# Altium PCB PCB1.PcbDoc
Units mm, origin at the board's own origin, x right, y up, seen from the top; angles counter-clockwise.
Board outline 40 x 30 mm, 2 copper layers (Top Layer, Bottom Layer); 3 components, 7 nets, 38 pads, 0 vias.
Unrouted connection lines stored in the file: 3.
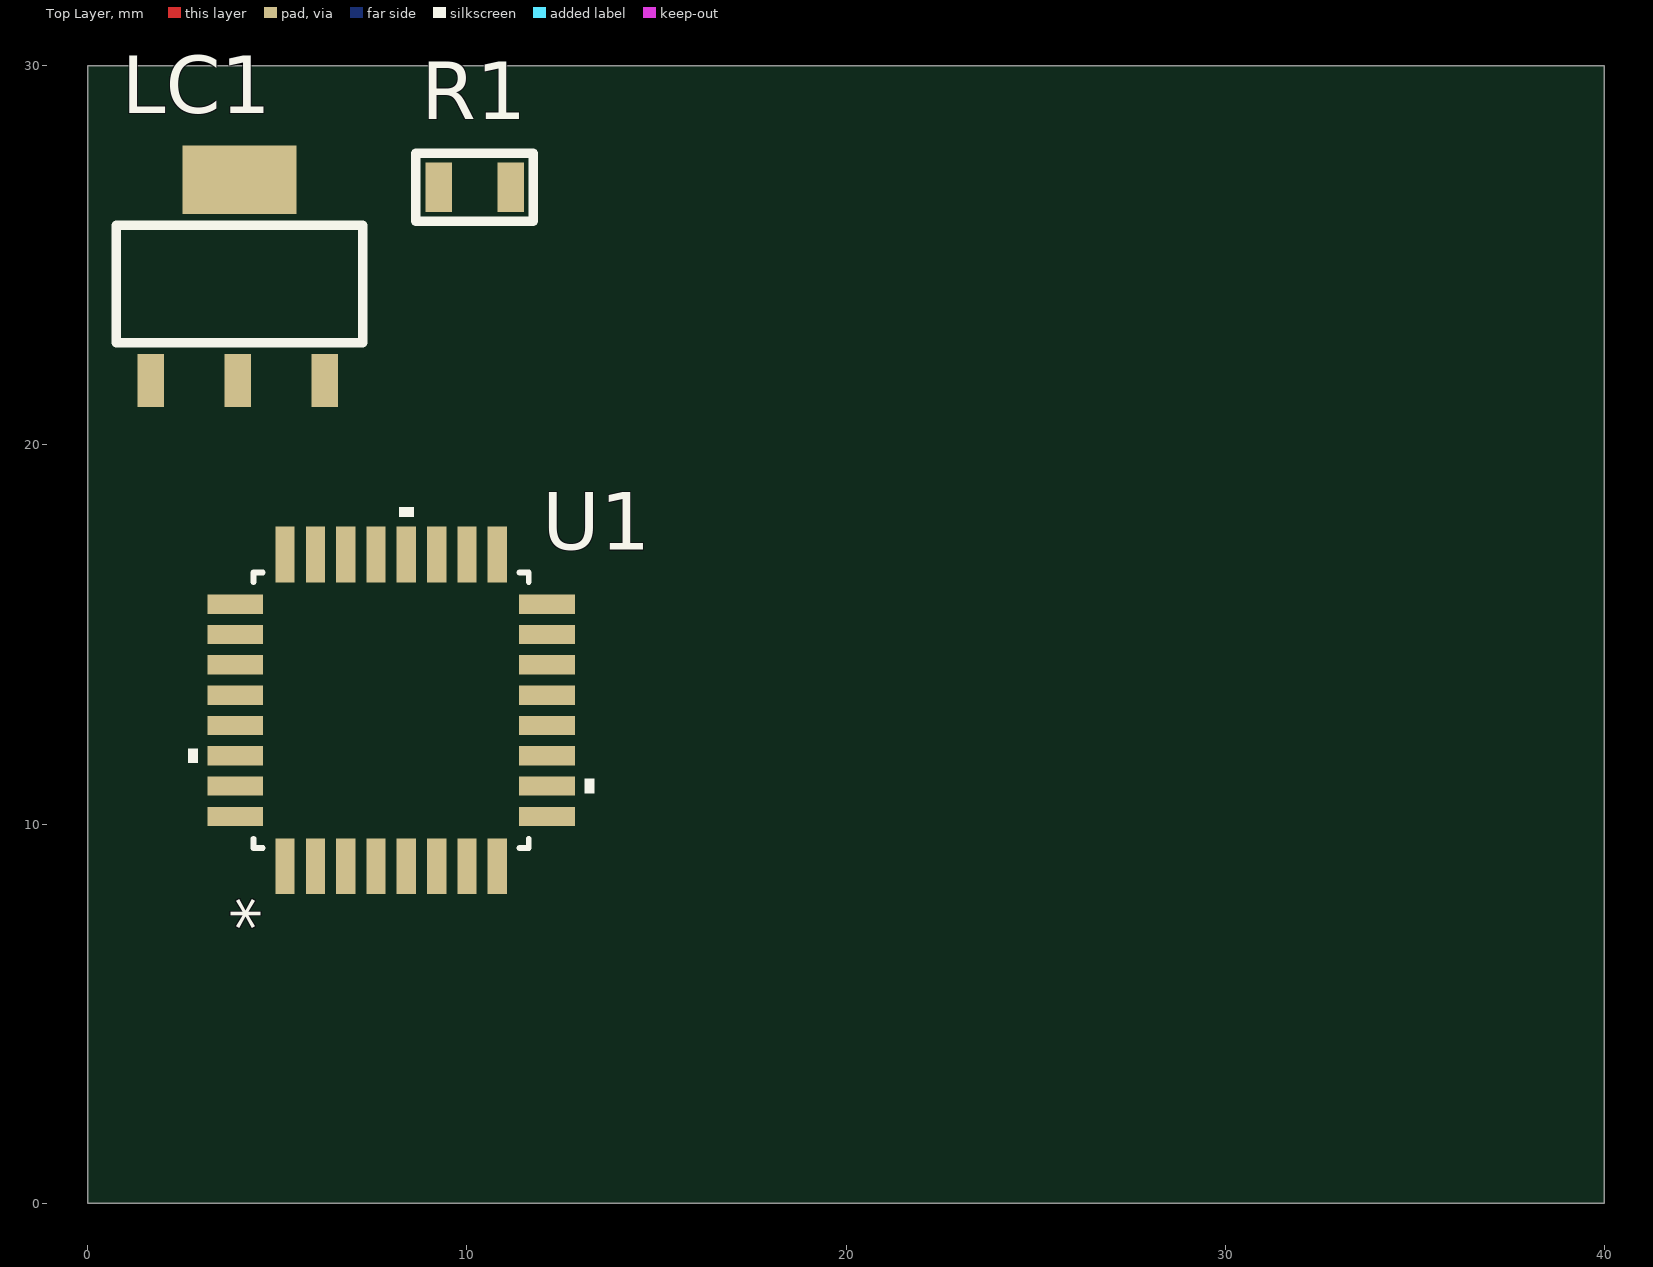
[diagram p0: Top Layer view]
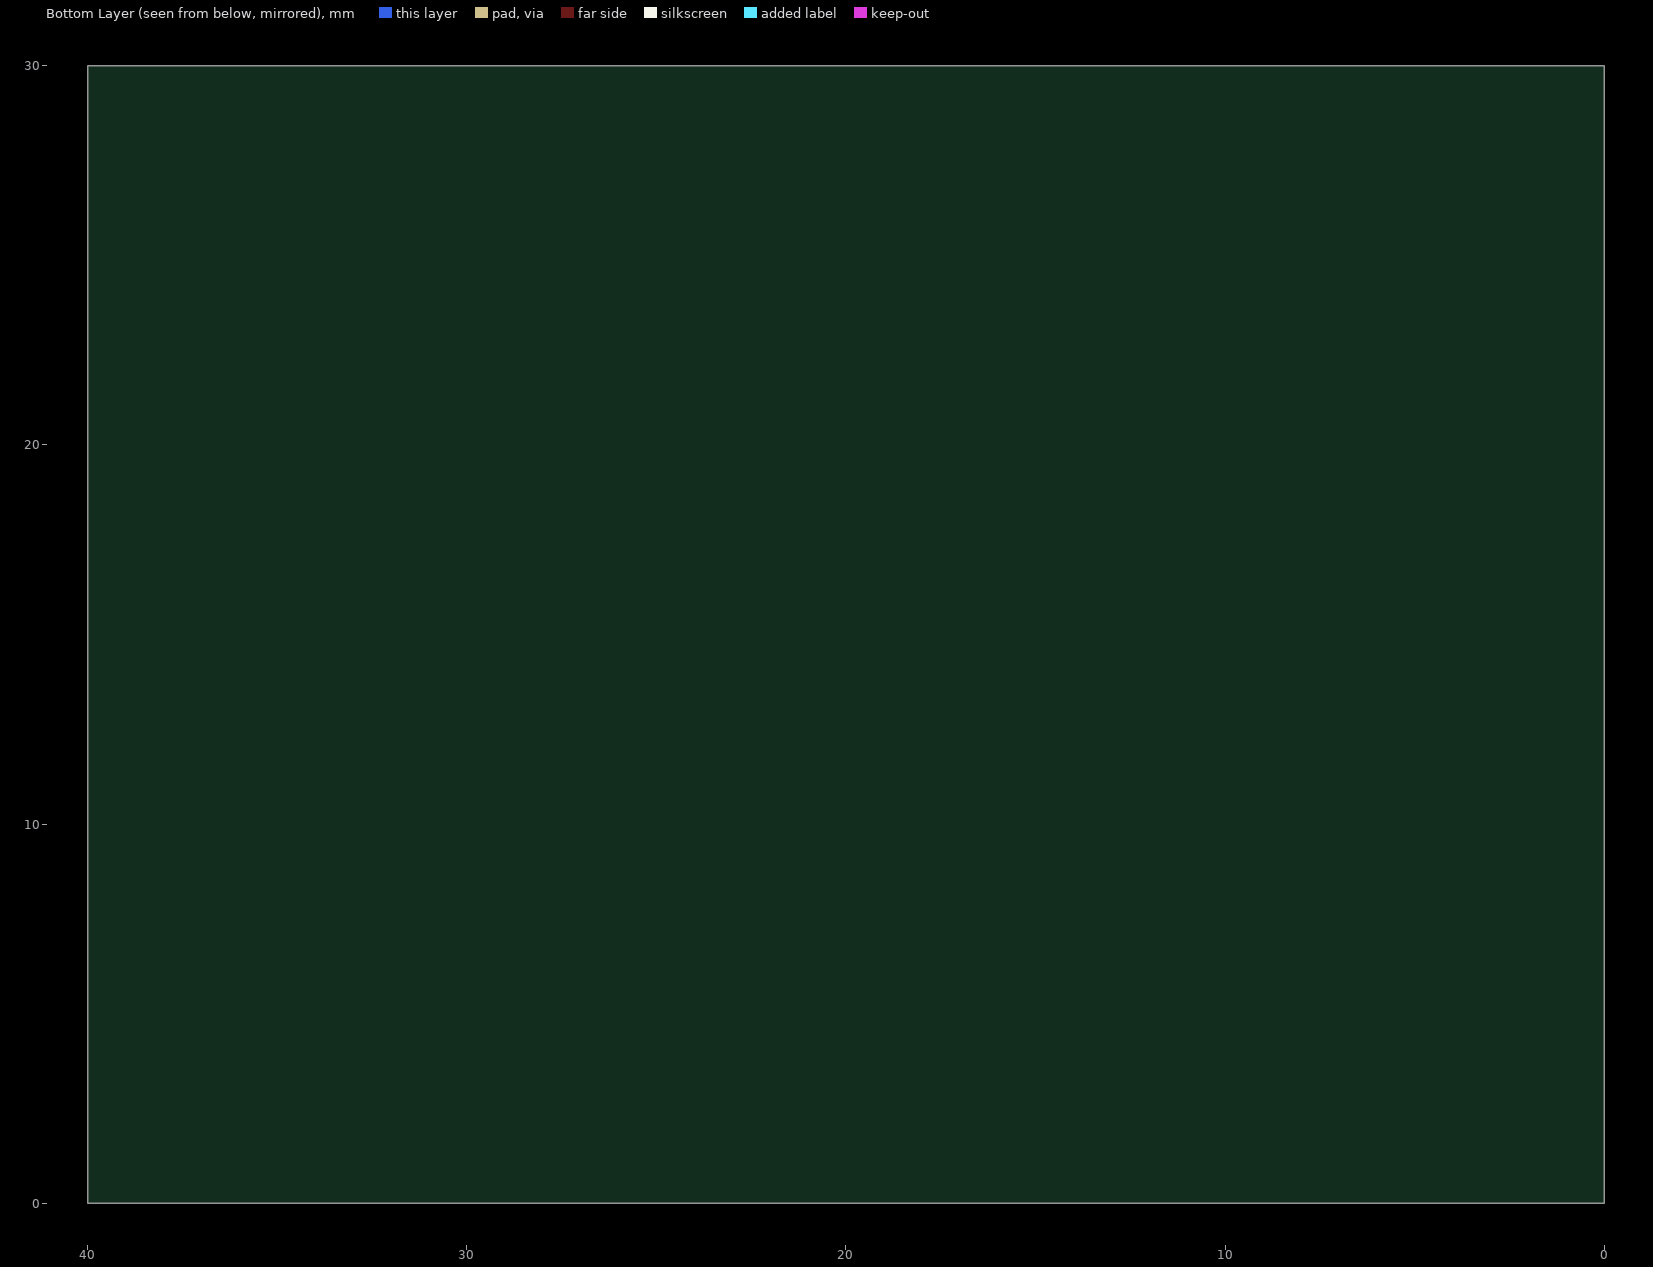
[diagram p1: Bottom Layer view, seen from below]

## Layer stack, top to bottom
Top Solder: solder mask 0.0102, Solder Resist, Dk 3.5
Top Layer: signal copper 0.0356
Dielectric 1: dielectric 0.32, FR-4, Dk 4.8
Bottom Layer: signal copper 0.0356
Bottom Solder: solder mask 0.0102, Solder Resist, Dk 3.5

## Board outline
0,0 40,0 40,30 0,30

## Design rules (kind name [scope] priority, off if disabled: settings)
Clearance [All] p1: gap=0.254 ignorepadtopadclearanceinfootprint=FALSE except(0: Arc-Hole Track-Hole SMDPad-Hole THPad-Hole Via-Hole Fill-Hole Poly-Hole Region-Hole Text-Hole)
PolygonConnect [All] p1: connectstyle=Relief reliefconductorwidth=0.254 reliefentries=4 polygonreliefangle="90 Angle" airgapwidth=0.254
RoomDefinition Sheet1 [InComponentClass('Sheet1')] p1: confinementstyle=ConfineIn formatcopy=TRUE lockcomponents=FALSE outline -50.8,-76.2 0,-76.2 0,-50.8 -50.8,-50.8
RoutingVias [All] p1: holewidth=0.711 width=1.27 viastyle="Through Hole" minholewidth=0.711 minwidth=1.27 maxholewidth=0.711 maxwidth=1.27
SolderMaskExpansion [All] p1: expansion=0.102 istentingtop=FALSE
Width [All] p1: maxlimit=0.254 minlimit=0.254 preferedwidth=0.254
30 further rules are at their usual default settings.

## Components (designator, comment, footprint, x,y, rotation, side; value= is the part's Value field where it differs from the comment)
LC1 "LD1117" LD1117_SOT-223 3.95,24.35 r0 top
R1 "100" RESISTOR_SMD_0805 10.2,26.8 r0 top
U1 "STM32G030K6Tx" LQFP-32 8,13 r90 top value=Value

## Footprints (in the part's own frame and the unit in brackets; to place one, negate y for a bottom-side part, rotate by r counter-clockwise, add the part's x,y. Pads: shape width x height; smd on the part's side, far side on the other; paste and mask are expansions set on the pad)
LD1117_SOT-223 [mm]
  rect 0.7x1.4 smd: 1(-2.3,-2.65) 2(0,-2.65) 3(2.3,-2.65)
  rect 3x1.8 smd: 4(0.05,2.65)
  silkscreen extent -3.2,-1.65 3.3,1.45
LQFP-32 [mil] "STM32 package, LQFP-32, 7 x 7mm"
  rect 58x20 smd paste+0 mask+0: 1(-162,110.24) 2(-162,78.74) 3(-162,47.24) 4(-162,15.75) 5(-162,-15.75) 6(-162,-47.24) 7(-162,-78.74) 8(-162,-110.24) 17(162,-110.24) 18(162,-78.74) 19(162,-47.24) 20(162,-15.75) 21(162,15.75) 22(162,47.24) 23(162,78.74) 24(162,110.24)
  rect 20x58 smd paste+0 mask+0: 9(-110.24,-162) 10(-78.74,-162) 11(-47.24,-162) 12(-15.75,-162) 13(15.75,-162) 14(47.24,-162) 15(78.74,-162) 16(110.24,-162) 25(110.24,162) 26(78.74,162) 27(47.24,162) 28(15.75,162) 29(-15.75,162) 30(-47.24,162) 31(-78.74,162) 32(-110.24,162)
  silkscreen extent -143,-211 211,211, body extent -177,-177 177,177, height 63
RESISTOR_SMD_0805 [mm]
  rect 0.7x1.3 smd: 1(-0.95,0) 2(0.95,0)
  silkscreen extent -1.55,-0.9 1.55,0.9, body extent -1.55,-0.9 1.55,0.9, height 1

## Part data
R1: library part Resistor_smd
U1: "The STM32G030x6/x8 mainstream microcontrollers are based on high-performance Arm® Cortex®-M0+ 32-bit RISC core operating at up to 64 MHz frequency. / 32K Flash and 8K RAM with 32pin LQFP 7x7x1.4 package", Manufacturer_Part_Number=STM32G0_LQFP32_T2, Copyright="Copyright (C) 2018 Accelerated Designs. All rights reserved", RefDes=RefDes, Type=DEV, Vendor=STMicroelectronics

## Nets (pads, with @x,y where several pads share a name; then routed paths per layer and width w, separated by ;. In a path a pad name is that pad's centre, name@x,y a point inside that pad or via, vN(x,y) a via of type N, cw(c..) or ccw(c..) an arc to the next point about the centre after c; other vN are vias at no path point)
+5: LC1.3
GND: LC1.1 U1.5
NetU1_2: U1.2
NetU1_3: U1.3
NRST: R1.1
VCC: R1.2 U1.4
VDD: LC1.2 LC1.4
pads on no net: U1.1 U1.6 U1.7 U1.8 U1.9 U1.10 U1.11 U1.12 U1.13 U1.14 U1.15 U1.16 U1.17 U1.18 U1.19 U1.20 U1.21 U1.22 U1.23 U1.24 U1.25 U1.26 U1.27 U1.28 U1.29 U1.30 U1.31 U1.32

## Text inside footprints (layer, text, board x,y; h text height)
U1: Top Overlay "*" at 5.054,7.196 h1.27 r90; Mechanical 7 "0.354in/8.992mm" at 8.317,22.449 h0.64 r90; Mechanical 7 "0.276in/7.01mm" at 8.317,1.011 h0.64 r90; Mechanical 7 "0.276in/7.01mm" at 16.179,10.777 h0.64 r90; Mechanical 7 "0.354in/8.992mm" at -1.449,10.619 h0.64 r90; Mechanical 7 "0.03in/0.762mm" at 0.456,14.892 h0.64 r90; Mechanical 7 "0.031in/0.8mm" at 5.917,20.544 h0.64 r90; Mechanical 7 "Alt 2 Padstyle: OX90Y60D30P" at 26.466,4.427 h1.27 r90; Mechanical 7 "Alt 1 Padstyle: OX60Y90D30P" at 24.942,4.427 h1.27 r90; Mechanical 7 "Default Vert Padstyle: RX20Y58D0T" at 20.37,2.522 h1.27 r90; Mechanical 7 "Default Horiz Padstyle: RX20Y58D0T" at 18.846,2.205 h1.27 r90; Mechanical 13 "*" at 5.435,9.558 h1.27 r90